# Altium PCB power_supply.PcbDoc
Units mm, origin at the board's own origin, x right, y up, seen from the top; angles counter-clockwise.
Board outline 67.06 x 59.44 mm, 2 copper layers (Top Layer, Bottom Layer); 15 components, 9 nets, 35 pads, 0 vias.
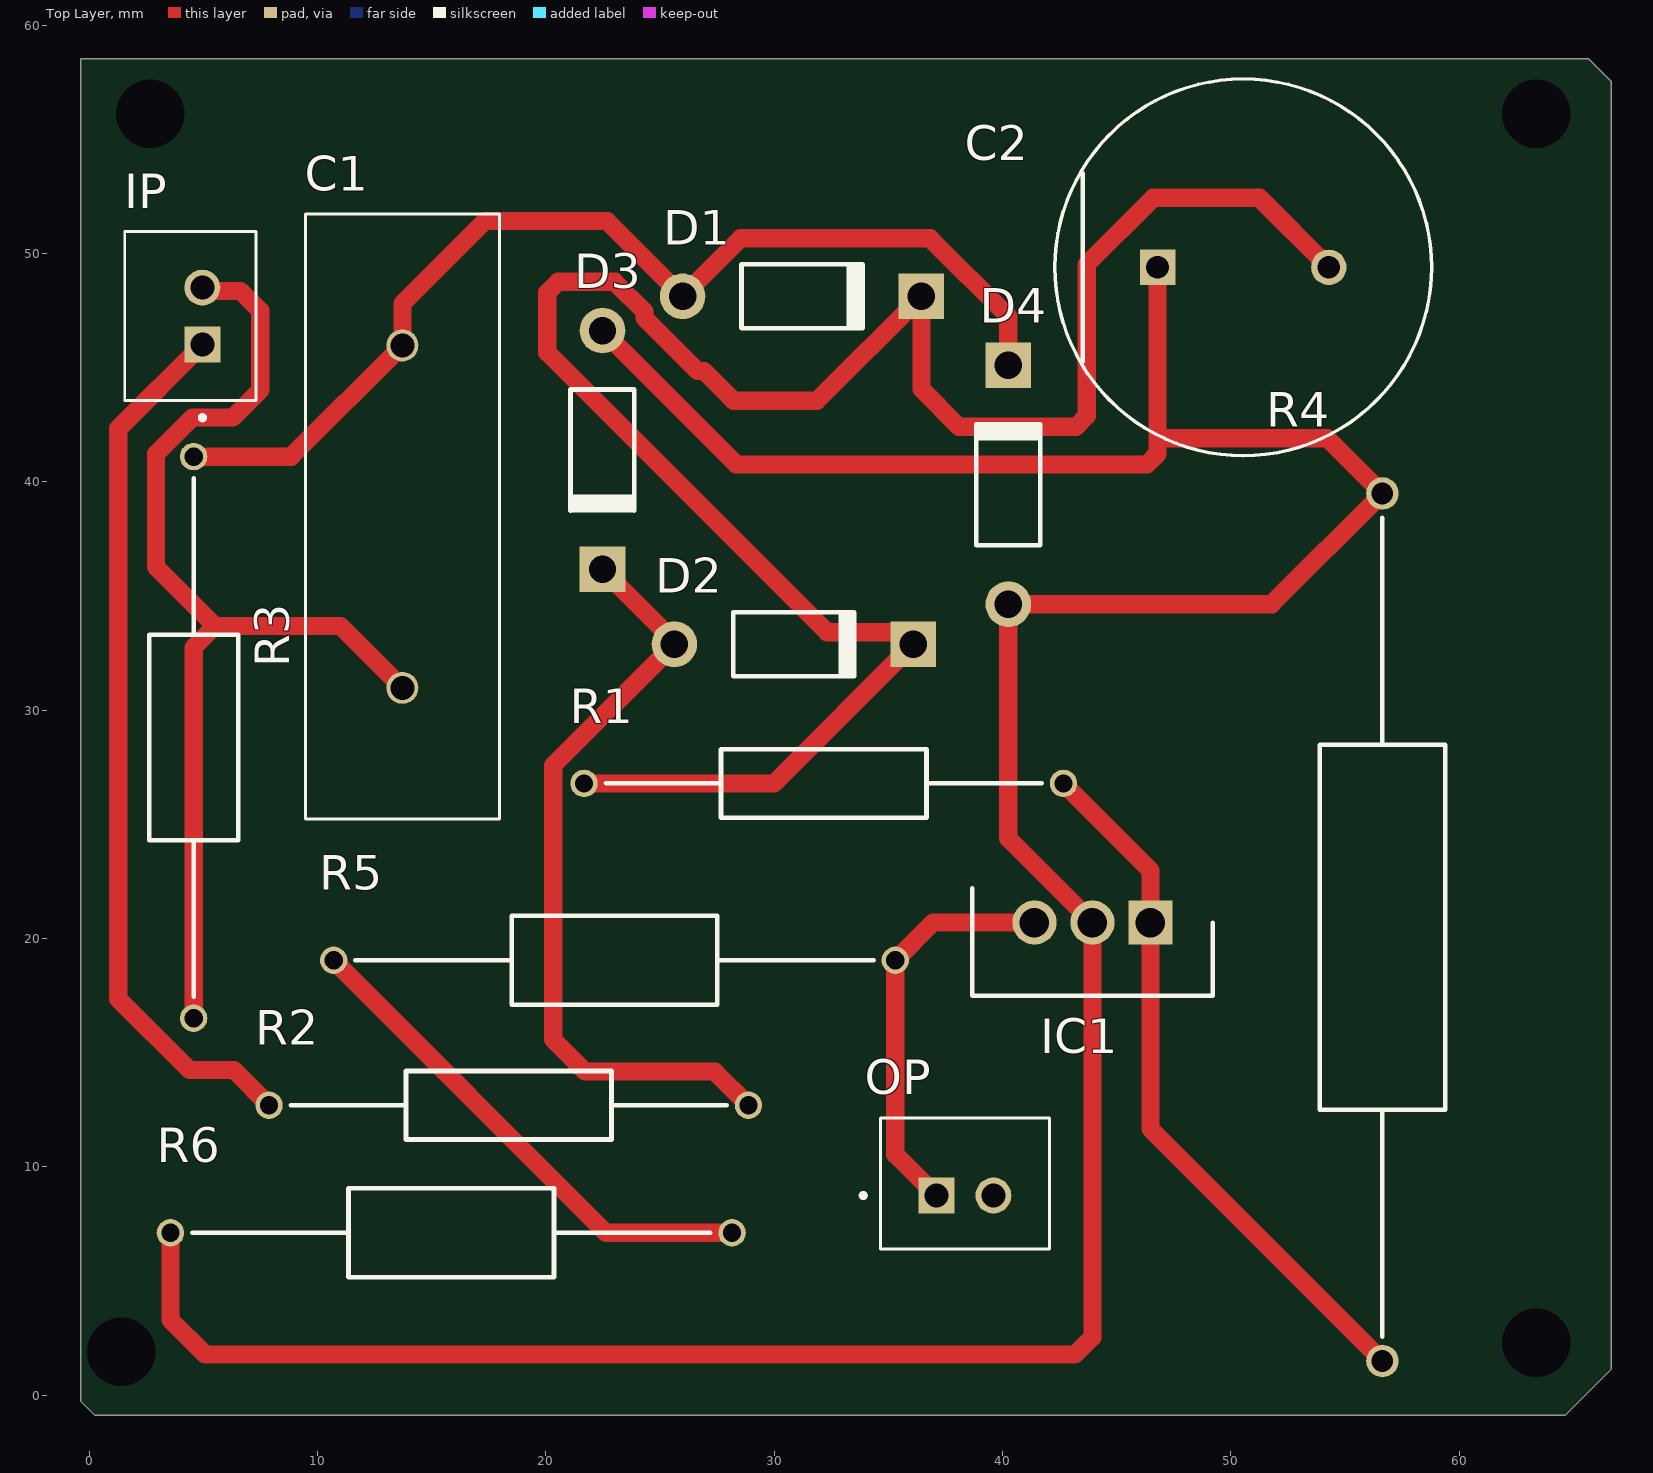
[diagram p0: Top Layer view]
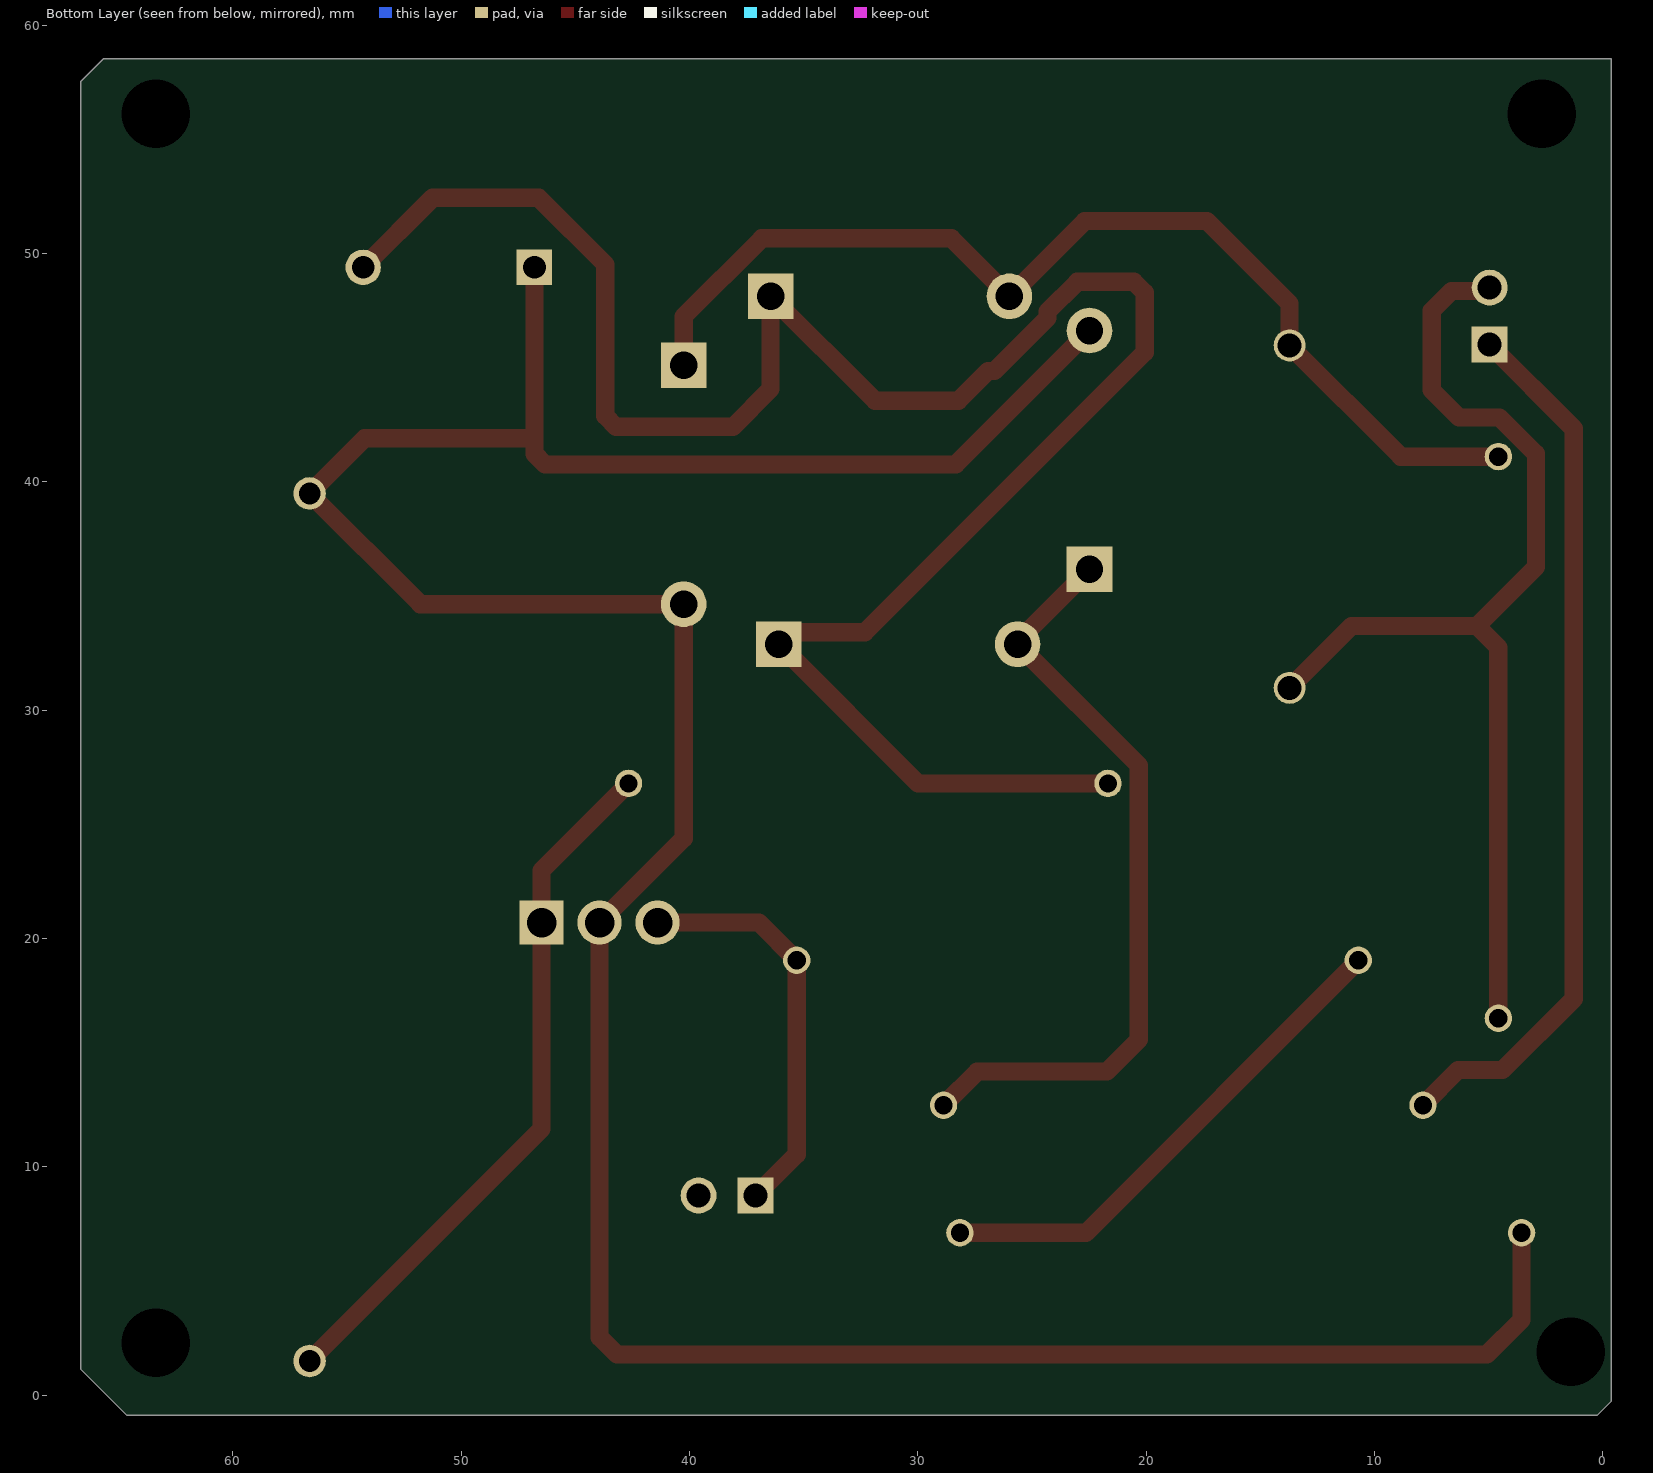
[diagram p1: Bottom Layer view, seen from below]
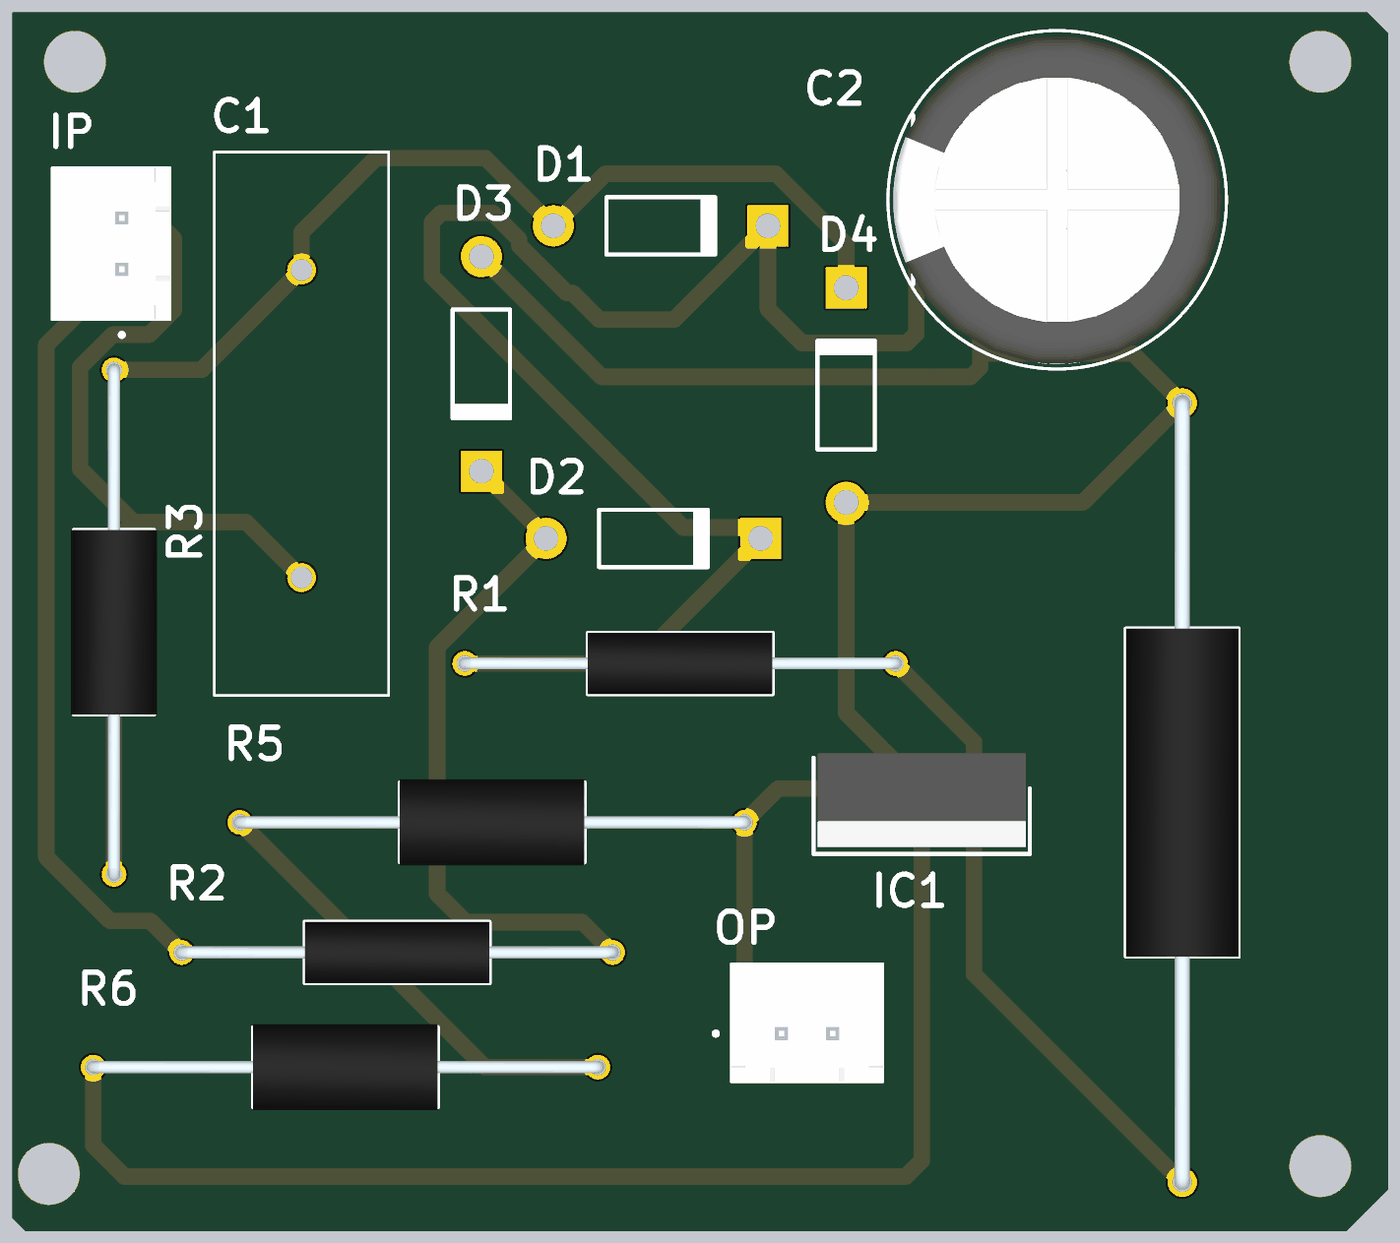
[diagram p2: 3D render of the assembled board from above, using the file's embedded part models]

## Layer stack, top to bottom
Top Solder: solder mask 0.0102, Solder Resist, Dk 3.5
Top Layer: signal copper 0.0356
Dielectric 1: dielectric 0.32, FR-4, Dk 4.8
Bottom Layer: signal copper 0.0356
Bottom Solder: solder mask 0.0102, Solder Resist, Dk 3.5

## Board outline
-0.381,58.547 -0.381,-0.254 0.254,-0.889 64.643,-0.889 66.675,1.143 66.675,57.531 65.659,58.547

## Design rules (kind name [scope] priority, off if disabled: settings)
Clearance [All] p1: gap=0.254 ignorepadtopadclearanceinfootprint=FALSE except(0: Arc-Hole Track-Hole SMDPad-Hole THPad-Hole Via-Hole Fill-Hole Poly-Hole Region-Hole Text-Hole)
HoleSize [All] p1: absolutevalues=TRUE maxlimit=3.5 minlimit=0.025 maxpercent=80.000 minpercent=20.000
PolygonConnect [All] p1: connectstyle=Relief reliefconductorwidth=0.254 reliefentries=4 polygonreliefangle="90 Angle" airgapwidth=0.254
RoutingVias [All] p1: holewidth=0.711 width=1.27 viastyle="Through Hole" minholewidth=0.711 minwidth=1.27 maxholewidth=0.711 maxwidth=1.27
SilkToSolderMaskClearance [IsPad] p1: minsilkscreentomaskgap=0.1 clearancetoexposedcopper=TRUE
SolderMaskExpansion [All] p1: expansion=0.102 istentingtop=FALSE
Width [All] p1: maxlimit=1.5 minlimit=0.8 preferedwidth=1.3 minimp=50.000000 maximp=50.000000 favimp=50.000000
28 further rules are at their usual default settings.

## Components (designator, comment, footprint, x,y, rotation, side; value= is the part's Value field where it differs from the comment)
C1 "ECQE4105JTB" CAPRR1500W80L2650T850H2300 13.716,38.481 r90 top
C2 "EEUFR1H102B" FP-RAD-TH-D_16_0_5-L_25_2-MFG 50.546,49.403 r0 top
D1 "Diode 1N4001" DO-41 31.219,48.133 r0 top
D2 "Diode 1N4001" DO-41 30.861,32.893 r0 top
D3 "Diode 1N4001" DO-41 22.479,41.402 r270 top
D4 "Diode 1N4001" DO-41 40.259,39.878 r90 top
IC1 "LM7824CT" TO254P470X1028X1955-3P 46.482,20.701 r180 top
IP "B2B-XH-A(LF)(SN)" JST_B2B-XH-A(LF)(SN) 4.428,47.264 r90 top
OP "B2B-XH-A(LF)(SN)" JST_B2B-XH-A(LF)(SN) 38.354,9.271 r0 top
R1 "100ohm" RESAD2100W59L900D300 21.672,26.797 r0 top
R2 "100ohm" RESAD2100W59L900D300 7.874,12.7 r0 top
R3 "1Mohm" RESAD2460W60L900D390 4.572,16.51 r90 top
R4 "1Kohm" RESAD3800W75L1600D550 56.642,39.497 r270 top
R5 "1Mohm" RESAD2460W60L900D390 10.706,19.05 r0 top
R6 "1Mohm" RESAD2460W60L900D390 3.556,7.112 r0 top

## Footprints (in the part's own frame and the unit in brackets; to place one, negate y for a bottom-side part, rotate by r counter-clockwise, add the part's x,y. Pads: shape width x height; smd on the part's side, far side on the other; paste and mask are expansions set on the pad)
CAPRR1500W80L2650T850H2300 [mm]
  round 1.4 hole 1.05: 1(-7.5,0) 2(7.5,0)
  silkscreen extent -13.25,-4.25 13.25,4.25
DO-41 [mm] "Diode, Axial; Body 5.2 x 2.7 mm (LxDia. max), Lead Dia. 0.86 mm (max)"
  round 2 hole 1.2: 1(-5.23,0)
  rect 2x2 hole 1.2: 2(5.23,0)
  silkscreen extent -2.65,-1.4 2.75,1.4
FP-RAD-TH-D_16_0_5-L_25_2-MFG [mm]
  rect 1.55x1.55 hole 1 paste-1000 mask+0: 1(-3.75,0)
  round 1.55 hole 1 paste-1000 mask+0: 2(3.75,0)
  silkscreen extent -8.25,-8.25 8.25,8.25, body extent -8.35,-8.35 8.35,8.35, height 0.25
JST_B2B-XH-A(LF)(SN) [mm]
  rect 1.575x1.575 / inner round 1.575 / far side rect 1.575x1.575 hole 1.05: 1(-1.25,-0.525)
  round 1.575 hole 1.05: 2(1.25,-0.525)
  silkscreen extent -4.55,-2.88 3.7,2.88, body extent -3.7,-2.88 3.7,2.88, height 7
RESAD2100W59L900D300 [mm]
  round 1.2 hole 0.8: 1(0,0) 2(21,0)
  silkscreen extent 0.95,-1.5 20.05,1.5, body extent -0.29,-1.5 21.3,1.5, height 2.99
RESAD2460W60L900D390 [mm]
  round 1.2 hole 0.8: 1(0,0) 2(24.6,0)
  silkscreen extent 0.95,-1.95 23.65,1.95, body extent -0.3,-2.1 24.9,2.1, height 4.2
RESAD3800W75L1600D550 [mm]
  round 1.425 hole 0.95: 1(0,0) 2(38,0)
  silkscreen extent 1.06,-2.75 36.94,2.75, body extent -0.37,-2.75 38.38,2.75, height 5.5
TO254P470X1028X1955-3P [mm]
  rect 1.935x1.935 hole 1.29: 1(0,0)
  round 1.935 hole 1.29: 2(2.54,0) 3(5.08,0)
  silkscreen extent -2.73,-1.5 7.81,3.2, body extent -2.54,-1.71 7.62,2.86, height 18.74

## Part data
C1: Package=None, Availability=Unavailable, MP=ECQE4105JTB, Price=None
C2: library part CMP-05427-000487-1, "Aluminum Electrolytic Capacitors (Radial Lead Type) 1000uF ±20% 50V", Capacitance=1mF, Case/Package=Radial, ESR (Equivalent Series Resistance)=16mR, Max Operating Temperature=105°C, Min Operating Temperature=-40°C, Package Quantity=250, Ripple Current=3.32A, Tolerance=20%, Voltage Rating=50V, Contact Plating=Tin, Diameter=16mm, Features="General Purpose", Height=25mm, Height - Seated (Max)=0.984inch, Impedance=16mR, Lead Diameter=0.8mm, Lead Free="Lead Free", Lead Pitch=7.5mm, Length=25mm, Life (Hours)=10000Hour, Mount="Through Hole", Number of Pins=2, Packaging="Tape and Reel", Polarity=Polar, Radiation Hardening=No, REACH SVHC="No SVHC", RoHS Compliant=Yes, Series=FR, Termination="Through Hole", Voltage Rating (DC)=50V
D1 D2 D3 D4: "1 Amp General Purpose Rectifier", Code_JEDEC=DO-204-AL, ComponentLink1Description="Manufacturer Link", ComponentLink1URL=http://www.fairchildsemi.com/, ComponentLink2Description=Datasheet, ComponentLink2URL=http://www.fairchildsemi.com/ds/1N%2F1N4001.pdf, DatasheetVersion=1998, LatestRevisionDate=17-Jul-2002, LatestRevisionNote="Re-released for DXP Platform.", PackageDescription="Diode, Axial; Body 5.2 x 2.7 mm (LxDia. max), Lead Dia. 0.86 mm (max)", PackageReference=DO-41, PackageVersion=Aug-1999, Published=8-Jun-2000, Publisher="Altium Limited"
IC1: "Integrated Circuit", Manufacturer_Name="Texas Instruments", Mouser Part Number=N/A, Datasheet Link=https://media.digikey.com/pdf/Data%20Sheets/National%20Semiconductor%20PDFs/LM140,LM340(A).LM7800C.pdf, Height=4.7mm, Manufacturer_Part_Number=LM7824CT, Mouser Price/Stock=https://www.mouser.co.uk/ProductDetail/Texas-Instruments/LM7824CT?qs=9V2QonpqdTsSUSVcEBRo9w%3D%3D
IP OP: "Connector Header Through Hole 2 position 0.098 (2.50mm)", Package=None, Check_prices=https://www.snapeda.com/parts/B2B-XH-A(LF)(SN)/JST+Sales+America+Inc./view-part/?ref=eda, MF="JST Sales", MP=B2B-XH-A(LF)(SN), SnapEDA_Link=https://www.snapeda.com/parts/B2B-XH-A(LF)(SN)/JST+Sales+America+Inc./view-part/?ref=snap
R1 R2: library part CFR50J100R, "Resistor", Manufacturer_Name="TE Connectivity", Mouser Part Number=279-CFR50J100R, Datasheet Link=https://componentsearchengine.com/Datasheets/1/CFR50J100R.pdf, Manufacturer_Part_Number=CFR50J100R, Mouser Price/Stock=https://www.mouser.co.uk/ProductDetail/TE-Connectivity-Holsworthy/CFR50J100R?qs=DDevMFOh4stqAwq6Act%2Fuw%3D%3D
R3 R5 R6: library part FMP200JR-52-1M, "Resistor", Manufacturer_Name=KEMET, Mouser Part Number=603-FMP200JR-52-1M, Arrow Part Number=FMP200JR-52-1M, Arrow Price/Stock=https://www.arrow.com/en/products/fmp200jr-52-1m/yageo, Datasheet Link=https://www.arrow.com/en/products/fmp200jr-52-1m/yageo, Manufacturer_Part_Number=FMP200JR-52-1M, Mouser Price/Stock=https://www.mouser.co.uk/ProductDetail/Yageo/FMP200JR-52-1M/?qs=EiYF7fRZytxLUrXUvoK13w%3D%3D
R4: library part CFR200J1K0, "Resistor", Manufacturer_Name="TE Connectivity", Mouser Part Number=279-CFR200J1K0, Arrow Part Number=CFR200J1K0, Arrow Price/Stock=https://www.arrow.com/en/products/cfr200j1k0/te-connectivity, Datasheet Link=https://altium.componentsearchengine.com/Datasheets/2/CFR200J1K0.pdf, Manufacturer_Part_Number=CFR200J1K0, Mouser Price/Stock=https://www.mouser.com/Search/Refine.aspx?Keyword=279-CFR200J1K0

## Free pads (board coordinates)
  round 1.524 hole 3: 1(2.667,56.134) 3(63.373,56.134) 4(1.397,1.905) 4(63.373,2.286)

## Nets (pads, with @x,y where several pads share a name; then routed paths per layer and width w, separated by ;. In a path a pad name is that pad's centre, name@x,y a point inside that pad or via, vN(x,y) a via of type N, cw(c..) or ccw(c..) an arc to the next point about the centre after c; other vN are vias at no path point)
GND: R5.1 R6.2 | length 22.4
  Top Layer w0.8: R5.1 22.644,7.112 R6.2
NetC1_1: C1.1 IP.2 R3.1 | length 47.8
  Top Layer w0.8: R3.1 4.572,32.747 5.514,33.689 ; IP.2 5.101,48.366 6.625,48.366 7.493,47.498 7.493,44.03 6.293,42.83 4.518,42.83 2.921,41.232 2.921,36.283 5.514,33.689 ; C1.1 11.008,33.689 5.514,33.689
  Bottom Layer w0.8: IP.2@4.826,48.514 IP.2
NetC1_2: C1.2 D1.1 D4.2 R3.2 | length 47.2
  Top Layer w0.8: R3.2@4.445,41.021 4.534,41.11 R3.2 8.845,41.11 C1.2 13.716,47.814 17.337,51.435 22.687,51.435 D1.1 28.529,50.673 36.834,50.673 40.259,47.248 D4.2
NetC2_1: C2.1 D3.1 D4.1 IC1.2 R4.1 R6.1 | length 143.1
  Top Layer w0.8: R6.1 3.556,3.302 5.08,1.778 43.18,1.778 43.942,2.54 IC1.2 40.259,24.384 D4.1 51.793,34.648 R4.1 54.229,41.91 46.796,41.91 ; D3.1 28.344,40.767 46.327,40.767 46.796,41.236 46.796,41.91 ; C2.1 46.796,41.91
NetC2_2: C2.2 D1.2 D2.2 R1.1 | length 93.7
  Top Layer w0.8: R1.1 29.995,26.797 D2.2 35.56,33.424 32.312,33.424 20.066,45.67 20.066,48.299 20.535,48.768 23.015,48.768 24.317,47.466 24.317,47.184 26.638,44.863 26.92,44.863 28.222,43.561 31.877,43.561 D1.2 36.449,44.069 38.1,42.418 43.219,42.418 43.688,42.887 43.688,49.53 46.609,52.451 51.248,52.451 C2.2 54.296,49.47 C2.2@54.356,49.53
NetD2_1: D2.1 D3.2 R2.2 | length 33.8
  Top Layer w0.8: D3.2 25.631,33.02 D2.1 20.32,27.582 20.32,15.582 21.723,14.179 27.395,14.179 R2.2
NetIC1_1: IC1.1 R1.2 R4.2 | length 31.1
  Top Layer w0.8: R1.2 46.482,22.987 IC1.1 46.482,11.657 R4.2
NetIC1_3: IC1.3 OP.1 R5.2 | length 17.8
  Top Layer w0.8: OP.1 35.306,10.544 R5.2 36.957,20.701 IC1.3
NetIP_1: IP.1 R2.1 | length 38.7
  Top Layer w0.8: IP.1 1.27,42.331 1.27,17.36 4.387,14.243 6.331,14.243 R2.1
pads on no net: OP.2

## Silkscreen, mask and mechanical layers (free items; w line width, h text height)
Top Overlay:
Mechanical 1:
  lines w0.254: -0.254,-0.127 0.381,-0.762 64.643,-0.762 65.405,0 65.659,0.254 66.548,1.143 66.548,57.277 65.405,58.42 0.127,58.42 -0.127,58.42 -0.254,58.293 -0.254,-0.127